# Altium PCB Master_Pcb.PcbDoc
Units mm, origin at the board's own origin, x right, y up, seen from the top; angles counter-clockwise.
Board outline 119.89 x 99.82 mm, 2 copper layers (Top Layer, Bottom Layer); 36 components, 41 nets, 212 pads, 30 vias.
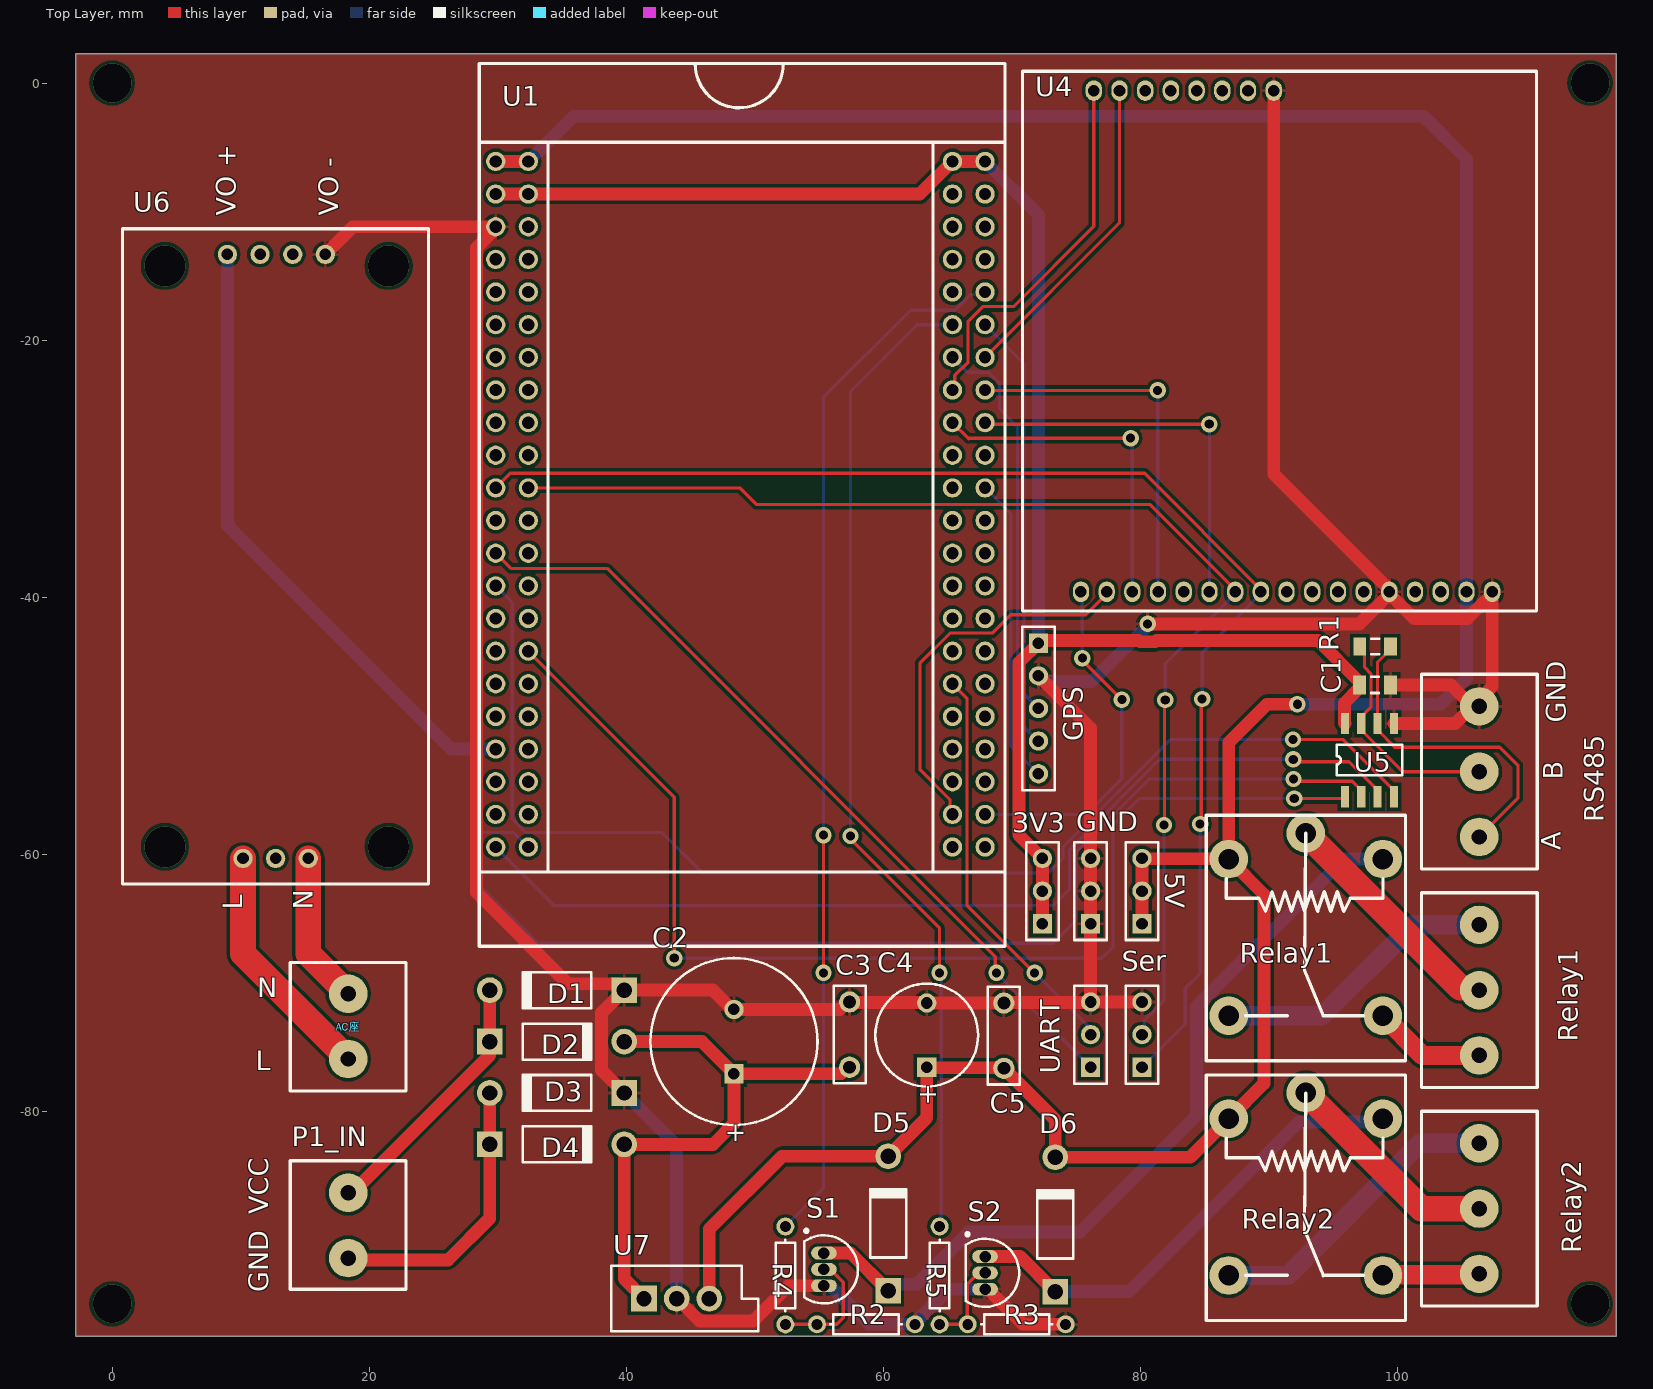
[diagram p0: Top Layer view]
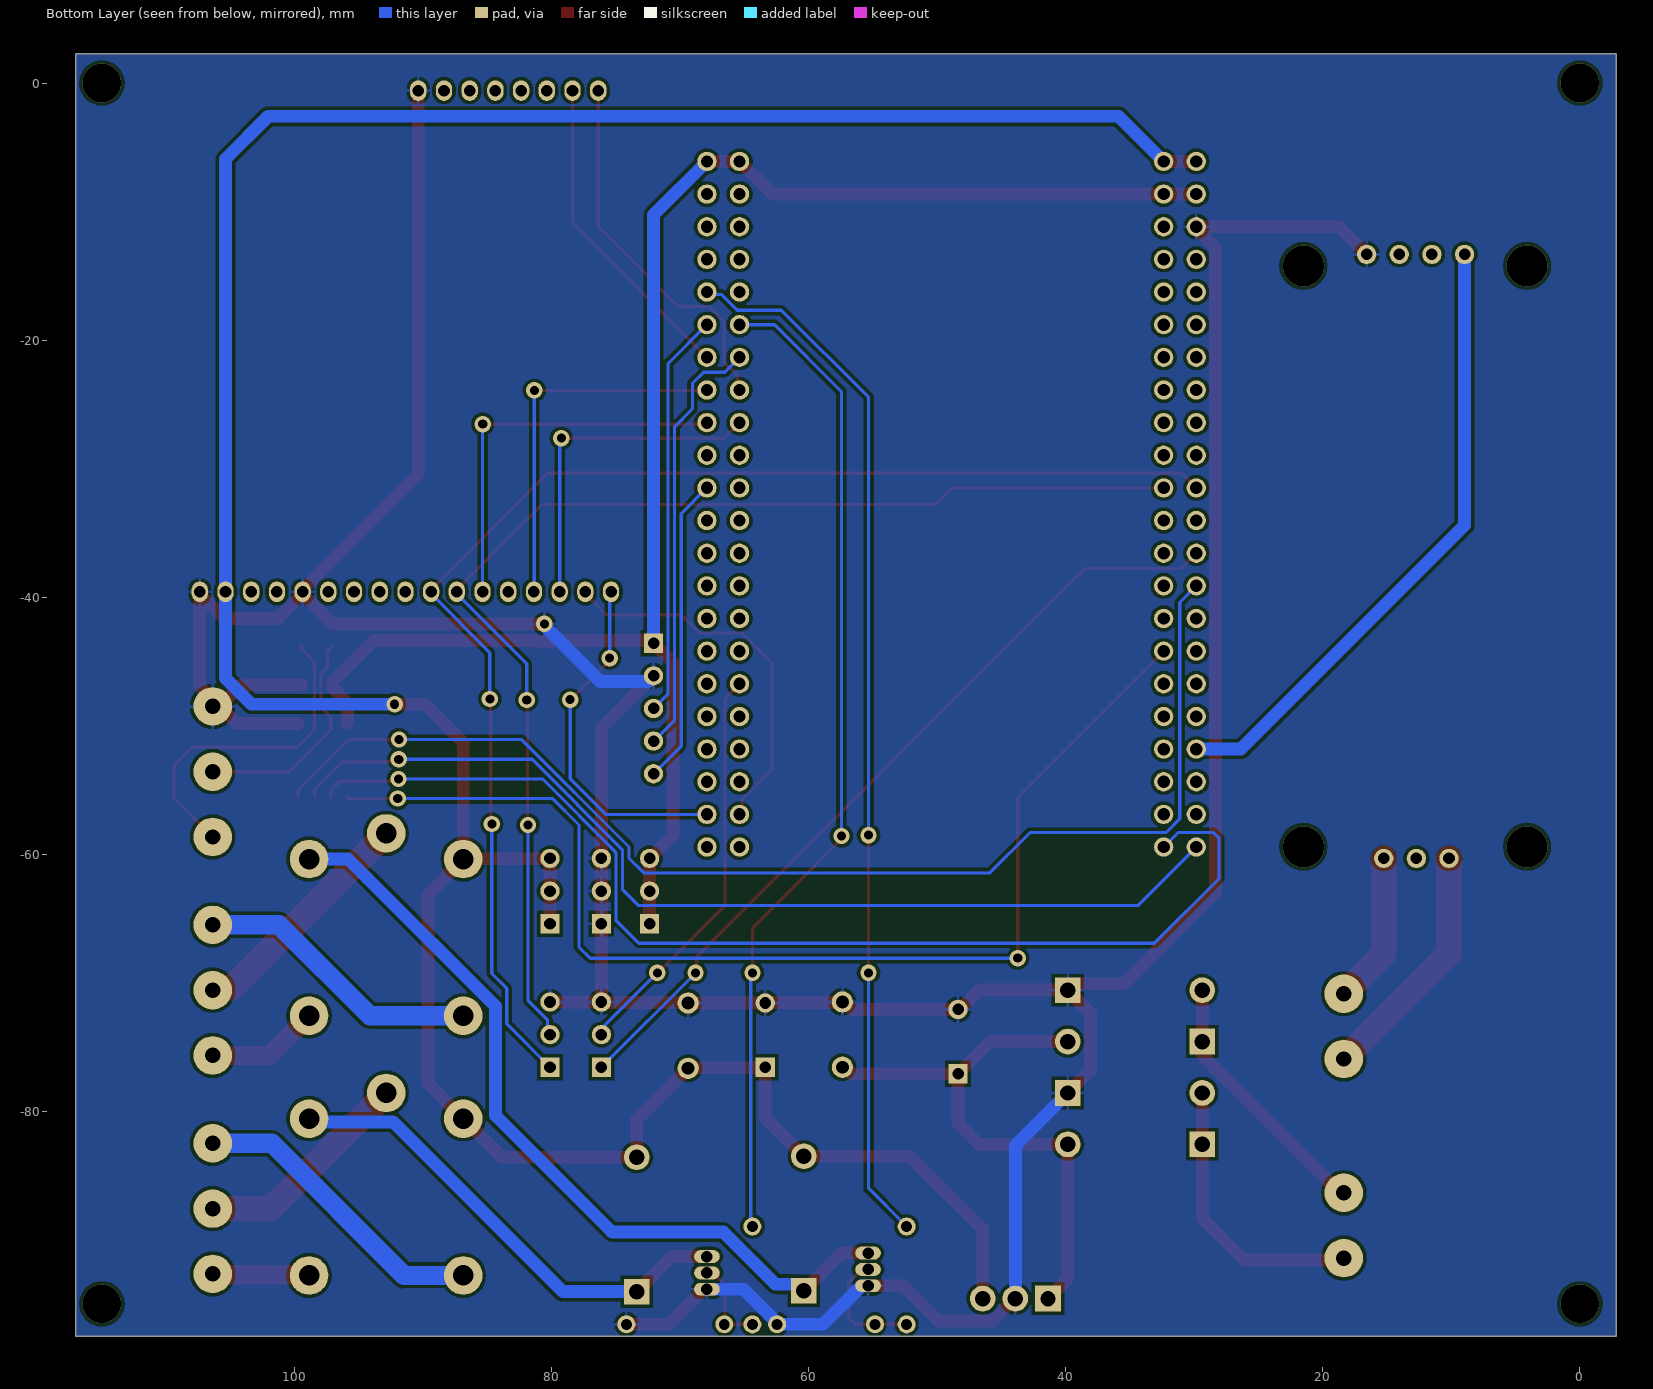
[diagram p1: Bottom Layer view, seen from below]

## Layer stack, top to bottom
Top Solder: solder mask 0.0102, Solder Resist, Dk 3.5
Top Layer: signal copper 0.0356
Dielectric 1: dielectric 0.32, FR-4, Dk 4.8
Bottom Layer: signal copper 0.0356
Bottom Solder: solder mask 0.0102, Solder Resist, Dk 3.5

## Board outline
-2.841,-97.536 -2.841,2.286 117.047,2.286 117.047,-97.536

## Design rules (kind name [scope] priority, off if disabled: settings)
Clearance [All] p1: gap=0.254 ignorepadtopadclearanceinfootprint=FALSE except(0: Arc-Hole Track-Hole SMDPad-Hole THPad-Hole Via-Hole Fill-Hole Poly-Hole Region-Hole Text-Hole)
PolygonConnect [All] p1: connectstyle=Relief reliefconductorwidth=0.254 reliefentries=4 polygonreliefangle="90 Angle" airgapwidth=0.254
RoutingVias [All] p1: holewidth=0.711 width=1.27 viastyle="Through Hole" minholewidth=0.711 minwidth=1.27 maxholewidth=0.711 maxwidth=1.27
SolderMaskExpansion [All] p1: expansion=0.102
Width [All] p1: maxlimit=10 minlimit=0.254 preferedwidth=0.254 minimp=50.000000 maximp=50.000000 favimp=50.000000
30 further rules are at their usual default settings.

## Classes and differential pairs
component class Master_Sch: 3V3 5V AC座 C1 C2 C3 C4 C5 D1 D2 D3 D4 D5 D6 GND GPS P1_IN R1 R2 R3 R4 R5 Relay1 Relay2 RS485 S1 S2 Ser U1 U4 U5 U6 U7 UART

## Components (designator, comment, footprint, x,y, rotation, side; value= is the part's Value field where it differs from the comment)
3V3 "Header 3" HDR1X3 72.385,-65.417 r90 top
5V "Header 3" HDR1X3 80.135,-65.417 r90 top
AC座 "2针座子" 2针座子 18.368,-75.941 r180 top
C1 "Cap" C2012 98.267,-46.837 r0 top
C2 "Cap1000uF" Cap1000uF 48.385,-77.087 r90 top
C3 "Cap104" Cap104 57.385,-76.587 r90 top
C4 "Cap100uF" Cap100uF 63.385,-76.587 r90 top
C5 "Cap104" Cap104 69.385,-76.667 r90 top
D1 "1N4007" 1N4007 39.845,-70.587 r180 top
D2 "1N4007" 1N4007 29.385,-74.587 r0 top
D3 "1N4007" 1N4007 39.845,-78.587 r180 top
D4 "1N4007" 1N4007 29.385,-82.587 r0 top
D5 "1N4007" 1N4007 60.385,-93.972 r90 top
D6 "1N4007" 1N4007 73.385,-94.047 r90 top
GND "Header 3" HDR1X3 76.135,-65.417 r90 top
GPS "Header 5" HDR1X5 72.078,-43.587 r270 top
P1_IN "2针座子" 2针座子 18.368,-86.36 r0 top
R1 "Res" R2012 98.283,-43.837 r180 top
R2 "Res1" AXIAL-0.3 58.655,-96.587 r0 top value=3.6K
R3 "Res1" AXIAL-0.3 70.385,-96.587 r0 top value=3.6K
R4 "Res1" AXIAL-0.3 52.385,-92.787 r270 top value=460
R5 "Res1" AXIAL-0.3 64.385,-92.787 r270 top value=460
Relay1 "Relay_single" Relay_single 98.885,-60.387 r270 top
Relay1 "3针座子" 3针座子 106.385,-65.507 r0 top
Relay2 "Relay_single" Relay_single 98.885,-80.587 r270 top
Relay2 "3针座子" 3针座子 106.385,-82.507 r0 top
RS485 "3针座子" 3针座子 106.385,-58.667 r180 top
S1 "S9013_NPN" S9013_NPN 55.385,-91.047 r180 top
S2 "S9013_NPN" S9013_NPN 67.925,-91.317 r180 top
Ser "Header 3" HDR1X3 80.135,-76.587 r90 top
U1 "STM32_F4" STM32_F4 28.57,1.524 r0 top
U4 "DTU" DTU 75.385,-39.587 r90 top
U5 "MAX485" SOP8 96.307,-52.632 r90 top
U6 "SANMIM" 2针宽座子 8.97,-13.335 r90 top
U7 "L7805CV" L7805CV 41.385,-94.587 r0 top
UART "Header 3" HDR1X3 76.135,-76.587 r90 top

## Footprints (in the part's own frame and the unit in brackets; to place one, negate y for a bottom-side part, rotate by r counter-clockwise, add the part's x,y. Pads: shape width x height; smd on the part's side, far side on the other; paste and mask are expansions set on the pad)
1N4007 [mm]
  rect 2x2 hole 1.2: 1(0,0)
  round 2 hole 1.2: 2(10.46,0)
  silkscreen extent 2.58,-1.4 7.98,1.4
2针宽座子 [mm]
  round 1.5 hole 0.9: 1(-47,-1.21) 2(-47,-6.29) 3(0,-7.62) 4(0,0) 5(-47,-3.75) 6(0,-5.08) 7(0,-2.54)
  silkscreen extent -49,-15.64 2,8.16
2针座子 [mm]
  round 3 hole 1.2: 1(0,0) 2(0,-5.075)
  silkscreen extent -4.5,-7.5 4.5,2.5
3针座子 [mm]
  round 3 hole 1.2: 1(0,0) 2(0,-5.08) 3(0,-10.16)
  silkscreen extent -4.5,-12.66 4.5,2.5
AXIAL-0.3 [mm] "Axial Device, Thru-Hole; 2 Leads; 0.3 in Pin Spacing"
  round 1.4 hole 0.85: 1(-3.81,0) 2(3.81,0)
  silkscreen extent -2.77,-0.76 2.77,0.76
C2012 [mm] "Chip Capacitor, 2-Leads, Body 2.0x1.2mm, IPC Low Density"
  rect 1x1.45 smd: 1(-1.2,0) 2(1.2,0)
  silkscreen extent -0.3,-0.63 0.3,0.63, body extent -0.98,-0.6 1.02,0.6, height 0.5
Cap100uF [mm]
  rect 1.5x1.5 hole 0.9: 1(0,0)
  round 1.5 hole 0.9: 2(5,0)
  silkscreen extent -1.5,-4 6.5,4
Cap104 [mm]
  round 1.65 hole 1: 1(0,0) 2(5.08,0)
  silkscreen extent -1.26,-1.25 6.34,1.25
Cap1000uF [mm]
  rect 1.5x1.5 hole 0.9: 1(0,0)
  round 1.5 hole 0.9: 2(5,0)
  silkscreen extent -4,-6.5 9,6.5
DTU [mm]
  oval 1.6x1.27 hole 0.9: 1(0,0) 2(0,-2) 3(0,-4) 4(0,-6) 5(0,-8) 6(0,-10) 7(0,-12) 8(0,-14) 9(0,-16) 10(0,-18) 11(0,-20) 12(0,-22) 13(0,-24) 14(0,-26) 15(0,-28) 16(0,-30) 17(0,-32) 18(39,-15) 19(39,-13) 20(39,-11) 21(39,-9) 22(39,-7) 23(39,-5) 24(39,-3) 25(39,-1)
  silkscreen extent -1.5,-35.45 40.5,4.55
HDR1X3 [mm] "Connector; Header; 3 Position"
  rect 1.5x1.5 hole 0.9: 1(0,0)
  round 1.5 hole 0.9: 2(2.54,0) 3(5.08,0)
  silkscreen extent -1.27,-1.27 6.35,1.27, body extent -1.27,-1.27 6.35,1.27, height 7.58
HDR1X5 [mm] "Connector; Header; 5 Position"
  rect 1.5x1.5 hole 0.9: 1(0,0)
  round 1.5 hole 0.9: 2(2.54,0) 3(5.08,0) 4(7.62,0) 5(10.16,0)
  silkscreen extent -1.27,-1.27 11.43,1.27, body extent -1.27,-1.27 11.43,1.27, height 7.58
L7805CV [mm]
  rect 2x2 hole 1.2: 1(0,0)
  round 2 hole 1.2: 2(2.54,0) 3(5.08,0)
  silkscreen extent -2.54,-2.54 8.89,2.54
R2012 [mm] "Chip Resistor, 2-Leads, Body 2.0x1.2mm, IPC Low Density"
  rect 1x1.4 smd: 1(-1.2,0) 2(1.2,0)
  silkscreen extent -0.3,-0.6 0.3,0.6, body extent -0.98,-0.6 1.02,0.6, height 0.5
Relay_single [mm]
  round 3 hole 1.6: 1(0,0) 2(0,-12) 3(-2,-6) 4(12.2,0) 5(12.2,-12)
  silkscreen extent -3.4,-13.75 15.7,1.75, body extent -3.4,-13.75 15.7,1.75, height 15.6
S9013_NPN [mm]
  oval 2x1 hole 0.9: 1(0,0) 2(0,1.27) 3(0,2.54)
  silkscreen extent -2.65,-1.86 1.52,3.92, body extent -2.65,-1.39 1.52,3.93, height 5.33
SOP8 [mm]
  rect 1.651x0.635 smd: 1(-2.905,0.38) 2(-2.905,-0.89) 3(-2.905,-2.16) 4(-2.905,-3.43) 5(2.795,-3.43) 6(2.795,-2.16) 7(2.795,-0.89) 8(2.795,0.38)
  silkscreen extent -1.24,-4.07 1.13,1.01
STM32_F4 [mm]
  round 1.5 hole 0.96: 1(1.275,-7.625) 2(1.275,-10.165) 3(1.275,-12.706) 4(1.275,-15.246) 5(1.275,-17.787) 6(1.275,-20.327) 7(1.275,-22.868) 8(1.275,-25.408) 9(1.275,-27.949) 10(1.275,-30.489) 11(1.275,-33.03) 12(1.275,-35.57) 13(1.275,-38.111) 14(1.275,-40.651) 15(1.275,-43.192) 16(1.275,-45.732) 17(1.275,-48.273) 18(1.275,-50.813) 19(1.275,-53.354) 20(1.275,-55.894) 21(1.275,-58.435) 22(1.275,-60.975) 23(3.815,-7.625) 24(3.815,-10.166) 25(3.815,-12.706) 26(3.815,-15.246) 27(3.815,-17.787) 28(3.815,-20.327) 29(3.815,-22.868) 30(3.815,-25.408) 31(3.815,-27.949) 32(3.815,-30.489) 33(3.815,-33.03) 34(3.815,-35.57) 35(3.815,-38.111) 36(3.815,-40.651) 37(3.815,-43.192) 38(3.815,-45.732) 39(3.815,-48.273) 40(3.815,-50.813) 41(3.815,-53.354) 42(3.815,-55.894) 43(3.815,-58.435) 44(3.815,-60.975) 45(36.815,-7.625) 46(36.815,-10.166) 47(36.815,-12.706) 48(36.815,-15.246) 49(36.815,-17.787) 50(36.815,-20.327) 51(36.815,-22.868) 52(36.815,-25.408) 53(36.815,-27.949) 54(36.815,-30.489) 55(36.815,-33.03) 56(36.815,-35.57) 57(36.815,-38.111) 58(36.815,-40.651) 59(36.815,-43.192) 60(36.815,-45.732) 61(36.815,-48.273) 62(36.815,-50.813) 63(36.815,-53.354) 64(36.815,-55.894) 65(36.815,-58.435) 66(36.815,-60.975) 67(39.355,-7.625) 68(39.355,-10.166) 69(39.355,-12.706) 70(39.355,-15.246) 71(39.355,-17.787) 72(39.355,-20.327) 73(39.355,-22.868) 74(39.355,-25.408) 75(39.355,-27.949) 76(39.355,-30.489) 77(39.355,-33.03) 78(39.355,-35.57) 79(39.355,-38.111) 80(39.355,-40.651) 81(39.355,-43.192) 82(39.355,-45.732) 83(39.355,-48.273) 84(39.355,-50.813) 85(39.355,-53.354) 86(39.355,-55.894) 87(39.355,-58.435) 88(39.355,-60.975)
  silkscreen extent 0,-68.7 40.9,0

## Part data
3V3 5V GND Ser UART: "Header, 3-Pin", LatestRevisionDate=17-Jul-2002, LatestRevisionNote="Re-released for DXP Platform.", Publisher="Altium Limited"
C1: "贴片电容"
GPS: "Header, 5-Pin", LatestRevisionDate=17-Jul-2002, LatestRevisionNote="Re-released for DXP Platform.", Publisher="Altium Limited"
R1: "贴片电阻"
R2 R3 R4 R5: "Resistor", LatestRevisionDate=17-Jul-2002, LatestRevisionNote="Re-released for DXP Platform.", PackageDescription="Axial Device, Thru-Hole; 2 Leads; 0.3 in Pin Spacing", PackageReference=AXIAL-0.3, Published=8-Jun-2000, Publisher="Altium Limited"

## Via types
v1: diameter 1.27, hole 0.711, Top Layer to Bottom Layer, 22 vias
v2: diameter 3.2, hole 3.2, Top Layer to Bottom Layer, 4 vias
v3: diameter 3, hole 3, Top Layer to Bottom Layer, 4 vias

## Nets (pads, with @x,y where several pads share a name; then routed paths per layer and width w, separated by ;. In a path a pad name is that pad's centre, name@x,y a point inside that pad or via, vN(x,y) a via of type N, cw(c..) or ccw(c..) an arc to the next point about the centre after c; other vN are vias at no path point)
485_DE: U1.22 U5.3 | length 79
  Top Layer w0.254: v1(91.901,-52.629) 91.901,-52.682 91.977,-52.758 91.885,-52.85 92.135,-53.1 92.428,-52.807 96.245,-52.807 98.467,-55.029 U5.3
  Bottom Layer w0.254: U1.22 34.402,-64.008 73.22,-64.008 74.496,-62.732 74.496,-59.658 81.525,-52.629 v1(91.901,-52.629)
485_RE: U1.44 U5.2 | length 88.7
  Top Layer w0.254: v1(91.926,-54.153) 91.926,-54.329 91.925,-54.33 96.498,-54.33 97.197,-55.029 U5.2
  Bottom Layer w0.254: U1.44 31.254,-58.32 28.523,-58.32 28.071,-58.772 28.071,-61.9 33.1,-66.929 73.236,-66.929 75.004,-65.161 75.004,-59.869 80.72,-54.153 v1(91.926,-54.153)
485_RX: U1.38 U5.1 | length 91.5
  Top Layer w0.254: U1.38 43.743,-55.566 v1(43.743,-68.097) ; v1(91.977,-55.677) 95.787,-55.677 U5.1
  Bottom Layer w0.254: v1(43.743,-68.097) 77.017,-68.097 77.88,-67.234 77.88,-57.734 79.938,-55.677 v1(91.977,-55.677)
485_TX: U1.14 U5.4 | length 96
  Top Layer w0.254: v1(91.885,-51.087) 95.795,-51.087 99.737,-55.029 U5.4
  Bottom Layer w0.254: U1.14 31.139,-40.422 31.139,-57.264 32.195,-58.32 42.758,-58.32 45.905,-61.468 72.853,-61.468 73.988,-60.333 73.988,-59.448 82.349,-51.087 v1(91.885,-51.087)
GND: C1.2 C2.2 C3.2 C4.2 C5.2 D1.1 D3.1 GND.1 GND.2 GND.3 GPS.2 R2.2 R3.2 RS485.3 S1.3 S2.3 Ser.3 U1.3 U4.13 U4.17 U4.18 U5.5 U6.3 U7.2 UART.3 | length 318
  Top Layer w1: U6.3 18.743,-11.182 29.71,-11.182 29.845,-11.318 28.341,-12.822 28.341,-62.983 35.445,-70.087 39.345,-70.087 D1.1 ; D3.1 38.091,-76.833 38.091,-72.341 D1.1 ; U7.2 43.953,-94.587 45.707,-96.341 49.881,-96.341 52.635,-93.587 S1.3 ; S2.3 68.155,-93.857 70.885,-96.587 R3.2 ; GPS.2 76.135,-50.184 GND.3 GND.2 GND.1 UART.3 ; Ser.3 UART.3 ; v1(80.573,-42.088) 97.049,-42.088 U4.13@99.385,-39.752 ; U4.18 90.385,-30.422 99.385,-39.422 U4.13 U4.13@99.385,-39.752 ; C1.2 104.174,-46.837 RS485.3@105.844,-48.507 ; U5.5 104.514,-49.837 RS485.3@105.844,-48.507 ; U4.17 U4.17@107.385,-39.752 ; D1.1 46.75,-70.587 48.25,-72.087 C2.2 56.629,-72.087 57.209,-71.507 C3.2 57.425,-71.547 63.345,-71.547 C4.2 C5.2 69.425,-71.547 76.095,-71.547 UART.3 ; U4.13@99.385,-39.752 101.301,-41.668 105.469,-41.668 U4.17@107.385,-39.752 ; RS485.3@105.844,-48.507 RS485.3 106.385,-47.966 107.385,-46.966 U4.17@107.385,-39.752
  Bottom Layer w1: D3.1 43.925,-82.667 U7.2 ; S1.3 55.885,-93.587 58.885,-96.587 R2.2 ; 62.931,-96.013 62.931,-95.995 65.069,-93.857 S2.3 ; GPS.2 72.509,-46.558 76.255,-46.558 80.573,-42.24 v1(80.573,-42.088)
GPS_PPS: GPS.5 U1.77 | length 24
  Bottom Layer w0.254: U1.77 69.931,-33.512 69.931,-51.6 GPS.5
GPS_RX: GPS.4 U1.51 | length 33.6
  Bottom Layer w0.254: U1.51 66.54,-22.499 68.172,-22.499 69.056,-23.383 69.056,-25.364 70.439,-26.747 70.439,-49.568 GPS.4
GPS_TX: GPS.3 U1.72 | length 31.6
  Bottom Layer w0.254: U1.72 70.947,-21.826 70.947,-47.536 GPS.3
NetAC座_1: AC座.1 U6.1 | length 19
  Top Layer w2: U6.1 10.18,-67.753 AC座.1
NetAC座_2: AC座.2 U6.2 | length 11.8
  Top Layer w2: U6.2 15.26,-67.758 AC座.2
NetD5_1: D5.1 Relay1.1@98.885,-60.387 S1.1 | length 63.6
  Top Layer w1: S1.1 57.46,-91.047 D5.1
  Bottom Layer w1: D5.1 60.885,-93.472 62.58,-93.472 66.648,-89.404 75.318,-89.404 84.385,-80.337 84.385,-71.837 94.327,-61.895 94.338,-61.895 95.846,-60.387 Relay1.1@98.885,-60.387
NetD6_1: D6.1 Relay2.1@98.885,-80.587 S2.1 | length 37.7
  Top Layer w1: S2.1 70.655,-91.317 D6.1
  Bottom Layer w1: D6.1 79.134,-94.047 92.34,-80.841 98.631,-80.841 Relay2.1@98.885,-80.587
NetR1_1: R1.1 RS485.1 U5.6 | length 25.8
  Top Layer w0.254: R1.1 99.483,-44.037 98.467,-45.053 U5.6 98.467,-50.345 99.808,-51.686 107.984,-51.686 109.385,-53.087 109.385,-55.667 RS485.1
NetR1_2: R1.2 RS485.2 U5.7 | length 17.7
  Top Layer w0.254: R1.2 97.456,-44.21 97.456,-45.462 97.948,-45.954 97.948,-48.578 97.197,-49.329 U5.7 97.197,-50.345 100.439,-53.587 RS485.2
NetR2_1: R2.1 R4.2 S1.2 | length 9.4
  Top Layer w0.254: R4.2 52.39,-96.592 54.84,-96.592 R2.1 56.385,-96.587 56.885,-96.087 56.885,-93.317 55.885,-92.317 S1.2
NetR3_1: R3.1 R5.2 S2.2 | length 7
  Top Layer w0.254: R5.2 64.39,-96.592 66.508,-96.592 66.544,-96.556 66.544,-93.468 67.425,-92.587 S2.2
PB5: U1.19 U6.4 | length 49.2
  Bottom Layer w1: U6.4 8.97,-34.417 26.383,-51.83 U1.19
Relay1: R4.1 U1.71 | length 81.7
  Top Layer w0.254: v1@55.35,-69.291 v1(55.35,-58.522)
  Bottom Layer w0.254: R4.1 55.35,-86.012 v1@55.35,-69.291 ; v1(55.35,-58.522) 55.35,-24.46 62.138,-17.673 65.575,-17.673 66.794,-16.454 67.735,-16.454 U1.71
  other v1: 55.35,-69.24
Relay1_1: Relay1.1@106.385,-65.507 Relay1.5 | length 22.4
  Bottom Layer w1.5: Relay1.5 94.135,-72.587 101.215,-65.507 Relay1.1@106.385,-65.507
Relay1_2: Relay1.2@106.385,-70.587 Relay1.3@92.885,-58.387 | length 18.6
  Top Layer w2: Relay1.3@92.885,-58.387 104.894,-70.396 106.194,-70.396 Relay1.2@106.385,-70.587
Relay1_3: Relay1.3@106.385,-75.667 Relay1.4 | length 8.8
  Top Layer w1.5: Relay1.4 101.965,-75.667 Relay1.3@106.385,-75.667
Relay2: R5.1 U1.50 | length 78.6
  Top Layer w0.254: v1(57.459,-58.598) 57.459,-58.928 57.303,-59.084 57.716,-59.084 64.385,-65.753 v1(64.385,-69.24) v1@64.385,-69.299
  Bottom Layer w0.254: v1@57.459,-58.801 v1(57.459,-58.598) 57.459,-24.003 62.658,-18.804 U1.50 ; R5.1 64.516,-88.846 64.516,-69.43 v1@64.385,-69.299
Relay2_1: Relay2.1@106.385,-82.507 Relay2.5 | length 23.8
  Bottom Layer w1.5: Relay2.5 91.495,-92.787 101.775,-82.507 Relay2.1@106.385,-82.507
Relay2_2: Relay2.2@106.385,-87.587 Relay2.3@92.885,-78.587 | length 17.2
  Top Layer w2: Relay2.3@92.885,-78.587 101.885,-87.587 Relay2.2@106.385,-87.587
Relay2_3: Relay2.3@106.385,-92.667 Relay2.4 | length 8
  Top Layer w1.5: Relay2.4 98.945,-92.727 106.325,-92.727 Relay2.3@106.385,-92.667 ; Relay2.3@105.979,-92.087 Relay2.3@106.385,-92.087
Ser_IO_RT: U1.65 U4.2 | length 29.7
  Top Layer w0.254: U1.65 65.195,-56.721 65.195,-55.78 62.869,-53.454 62.869,-45.125 65.195,-42.799 68.482,-42.799 69.909,-41.373 75.764,-41.373 77.385,-39.752 U4.2
Ser_LIKA: U1.53 U4.3 | length 26.4
  Top Layer w0.254: U1.53 66.646,-27.686 66.697,-27.635 v1(79.252,-27.635)
  Bottom Layer w0.254: v1(79.252,-27.635) 79.385,-27.768 U4.3
Ser_LIKB: U1.74 U4.4 | length 29.1
  Top Layer w0.254: U1.74 67.959,-23.918 v1(81.351,-23.918)
  Bottom Layer w0.254: v1(81.351,-23.918) 81.351,-39.553 U4.4
Ser_LIKC: U1.52 U4.25 | length 29.3
  Top Layer w0.254: U1.52 65.575,-23.695 65.575,-22.754 66.603,-21.726 66.603,-18.527 67.735,-17.394 70.138,-17.394 76.385,-11.147 U4.25
Ser_LIKD: U1.73 U4.24 | length 25.1
  Top Layer w0.254: U1.73 78.385,-10.884 U4.24
Ser_RST: U1.87 U4.1 | length 27.8
  Top Layer w0.254: v1(75.493,-44.755) 75.43,-44.755 75.385,-44.8 v1(78.566,-47.981)
  Bottom Layer w0.254: U1.87 75.806,-56.911 78.566,-54.151 v1(78.566,-47.981) ; U4.1 75.493,-39.695 v1(75.493,-44.755)
Ser_RX: Ser.2 U1.33 U4.7 | length 95.9
  Top Layer w0.254: U1.33 48.829,-31.506 50.115,-32.791 80.754,-32.791 87.385,-39.422 U4.7 ; v1(81.843,-57.734) 81.893,-57.683 81.893,-48.057 v1(81.944,-48.006)
  Bottom Layer w0.254: Ser.2 80.325,-73.857 80.325,-72.916 81.843,-71.399 v1(81.843,-57.734) ; v1(81.944,-48.006) 81.944,-45.193 87.385,-39.752 U4.7
Ser_STAT: U1.75 U4.6 | length 30.9
  Top Layer w0.254: U1.75@68.144,-26.645 U1.75 68.043,-26.543 v1(85.373,-26.543)
  Bottom Layer w0.254: v1(85.373,-26.543) 85.385,-26.555 U4.6
Ser_TX: Ser.1 U1.11 U4.8 | length 104.8
  Top Layer w0.254: U1.11 30.976,-30.375 80.338,-30.375 89.385,-39.422 U4.8 ; v1(84.662,-57.658) 84.814,-57.506 84.738,-57.429 84.738,-48.006 v1(84.814,-47.93)
  Bottom Layer w0.254: Ser.1 83.504,-73.218 83.504,-70.449 84.662,-69.291 v1(84.662,-57.658) ; v1(84.814,-47.93) 84.814,-44.323 89.385,-39.752 U4.8
UART_RX: U1.61 UART.2 | length 32.1
  Top Layer w0.254: U1.61 66.516,-47.88 66.516,-63.998 71.467,-68.948 v1@71.467,-69.558 ; v1@71.784,-69.799 v1@71.918,-69.799
  Bottom Layer w0.254: v1(71.784,-69.24) 76.135,-73.591 UART.2
UART_TX: U1.13 UART.1 | length 63.8
  Top Layer w0.254: U1.13 31.028,-37.77 38.51,-37.77 68.711,-67.97 68.711,-69.342 v1@68.825,-69.456
  Bottom Layer w0.254: v1@68.8,-69.252 UART.1
  other v1: 68.812,-69.24
VCC_1: D1.2 D2.1 P1_IN.1 | length 20.3
  Top Layer w1: P1_IN.1@18.521,-86.513 29.385,-75.649 29.385,-75.181 D2.1@29.088,-74.884 ; D2.1 D1.2
VCC_2: D3.2 D4.1 P1_IN.2 | length 22
  Top Layer w1: P1_IN.2@18.542,-91.567 18.562,-91.587 26.142,-91.587 29.385,-88.344 D4.1 D3.2
VCC_3.3: 3V3.1 3V3.2 3V3.3 C1.1 GPS.1 U1.2 U1.24 U1.45 U1.67 U5.8 | length 131.3
  Top Layer w1: U1.2 U1.24 62.845,-8.642 U1.45 U1.67 ; 3V3.1 3V3.2 3V3.3 70.574,-58.526 70.574,-45.091 GPS.1 72.299,-43.366 79.886,-43.366 79.997,-43.477 81.148,-43.477 81.259,-43.366 93.821,-43.366 C1.1@97.067,-46.612 ; U5.8 95.885,-49.795 95.885,-48.244 C1.1@97.067,-47.062
  Bottom Layer w1: U1.67 72.078,-10.254 GPS.1
VCC_5: 5V.1 5V.2 5V.3 C4.1 C5.1 D5.2 D6.2 Relay1.2@86.885,-60.387 Relay2.2@86.885,-80.587 U1.1 U1.23 U4.16 U7.3 | length 242
  Top Layer w1: U1.1 U1.23 ; U7.3 46.465,-89.182 52.135,-83.512 D5.2 63.385,-80.512 C4.1 63.425,-76.627 69.345,-76.627 C5.1 73.385,-80.667 D6.2 83.885,-83.587 86.885,-80.587 89.635,-77.837 89.635,-63.137 86.885,-60.387 Relay1.2@86.86,-60.362 ; 5V.1 5V.2 5V.3 80.16,-60.362 Relay1.2@86.86,-60.362 ; v1(92.228,-48.337) 89.86,-48.337 86.885,-51.312 86.885,-60.337 Relay1.2@86.86,-60.362
  Bottom Layer w1: U1.23 35.896,-2.591 102.061,-2.591 105.385,-5.915 U4.16 105.385,-46.319 103.367,-48.337 v1(92.228,-48.337) ; 5V.3 5V.3@80.16,-60.362 ; Relay1.2@86.86,-60.362 Relay1.2@86.885,-60.387
VCC_IN: C2.1 C3.1 D2.2 D4.2 U7.1 | length 44.5
  Top Layer w1: D2.2 45.885,-74.587 C2.1 ; U7.1 39.845,-93.047 D4.2 46.75,-82.587 48.385,-80.952 C2.1 ; C3.1 57.209,-76.587 56.709,-77.087 C2.1
pads on no net: U1.4 U1.5 U1.6 U1.7 U1.8 U1.9 U1.10 U1.12 U1.15 U1.16 U1.17 U1.18 U1.20 U1.21 U1.25 U1.26 U1.27 U1.28 U1.29 U1.30 U1.31 U1.32 U1.34 U1.35 U1.36 U1.37 U1.39 U1.40 U1.41 U1.42 U1.43 U1.46 U1.47 U1.48 U1.49 U1.54 U1.55 U1.56 U1.57 U1.58 U1.59 U1.60 U1.62 U1.63 U1.64 U1.66 U1.68 U1.69 U1.70 U1.76 U1.78 U1.79 U1.80 U1.81 U1.82 U1.83 U1.84 U1.85 U1.86 U1.88 U4.5 U4.9 U4.10 U4.11 U4.12 U4.14 U4.15 U4.19 U4.20 U4.21 U4.22 U4.23 U6.5 U6.6 U6.7
copper on no net:
  other v2: 4.11,-59.435 21.51,-59.435 4.11,-14.235 21.51,-14.235
  other v3: 0,-95 115,-95 0,0 115,0

## Polygon pours and split planes (outlines as drawn)
GND on Top Layer (solid, remove dead copper, pour order 29): -2.841,2.286 117.047,2.286 117.047,-97.536 -2.841,-97.536 -2.841,2.286
no net on Top Layer "Top Layer-No Net" (solid, remove dead copper, pour order 21): -7.286,2.286
GND on Bottom Layer (solid, remove dead copper, pour order 31): -2.841,2.286 117.047,2.286 117.047,-97.536 -2.841,-97.536 -2.841,2.286

## Silkscreen, mask and mechanical layers (free items; w line width, h text height)
Top Overlay:
  text "GND" at 113.11,-49.784 h1.52 r90
  text "B" at 112.856,-54.229 h1.52 r90
  text "A" at 112.729,-59.69 h1.52 r90
  text "N" at 11.303,-71.12 h1.52
  text "L" at 11.176,-76.835 h1.52
Mechanical 1:
  the board outline again, w0.254

## Text inside footprints (layer, text, board x,y; h text height)
C2: Top Overlay "+" at 49.135,-82.562 h1.5 r90
C4: Top Overlay "+" at 64.137,-79.587 h1.5 r90
P1_IN: Top Overlay "VCC" at 12.145,-88.006 h1.52 r90; Top Overlay "GND" at 12.145,-94.102 h1.52 r90
U6: Top Overlay "VO -" at 17.61,-10.335 h1.52 r90; Top Overlay "VO +" at 9.61,-10.335 h1.52 r90; Top Overlay "N" at 15.61,-64.335 h1.52 r90; Top Overlay "L" at 10.11,-64.335 h1.52 r90